# Altium PCB LM-003.PcbDoc
Units mil, origin at the board's own origin, x right, y up, seen from the top; angles counter-clockwise.
Board outline 7000 x 7000 mil, 6 copper layers (Top Layer, +5V, Mid-Layer 1, +3.3V, Mid-Layer 2, Bottom Layer), stack 48.435 mil thick; 55 components, 97 nets, 357 pads, 0 vias.
Unrouted connection lines stored in the file: 193.
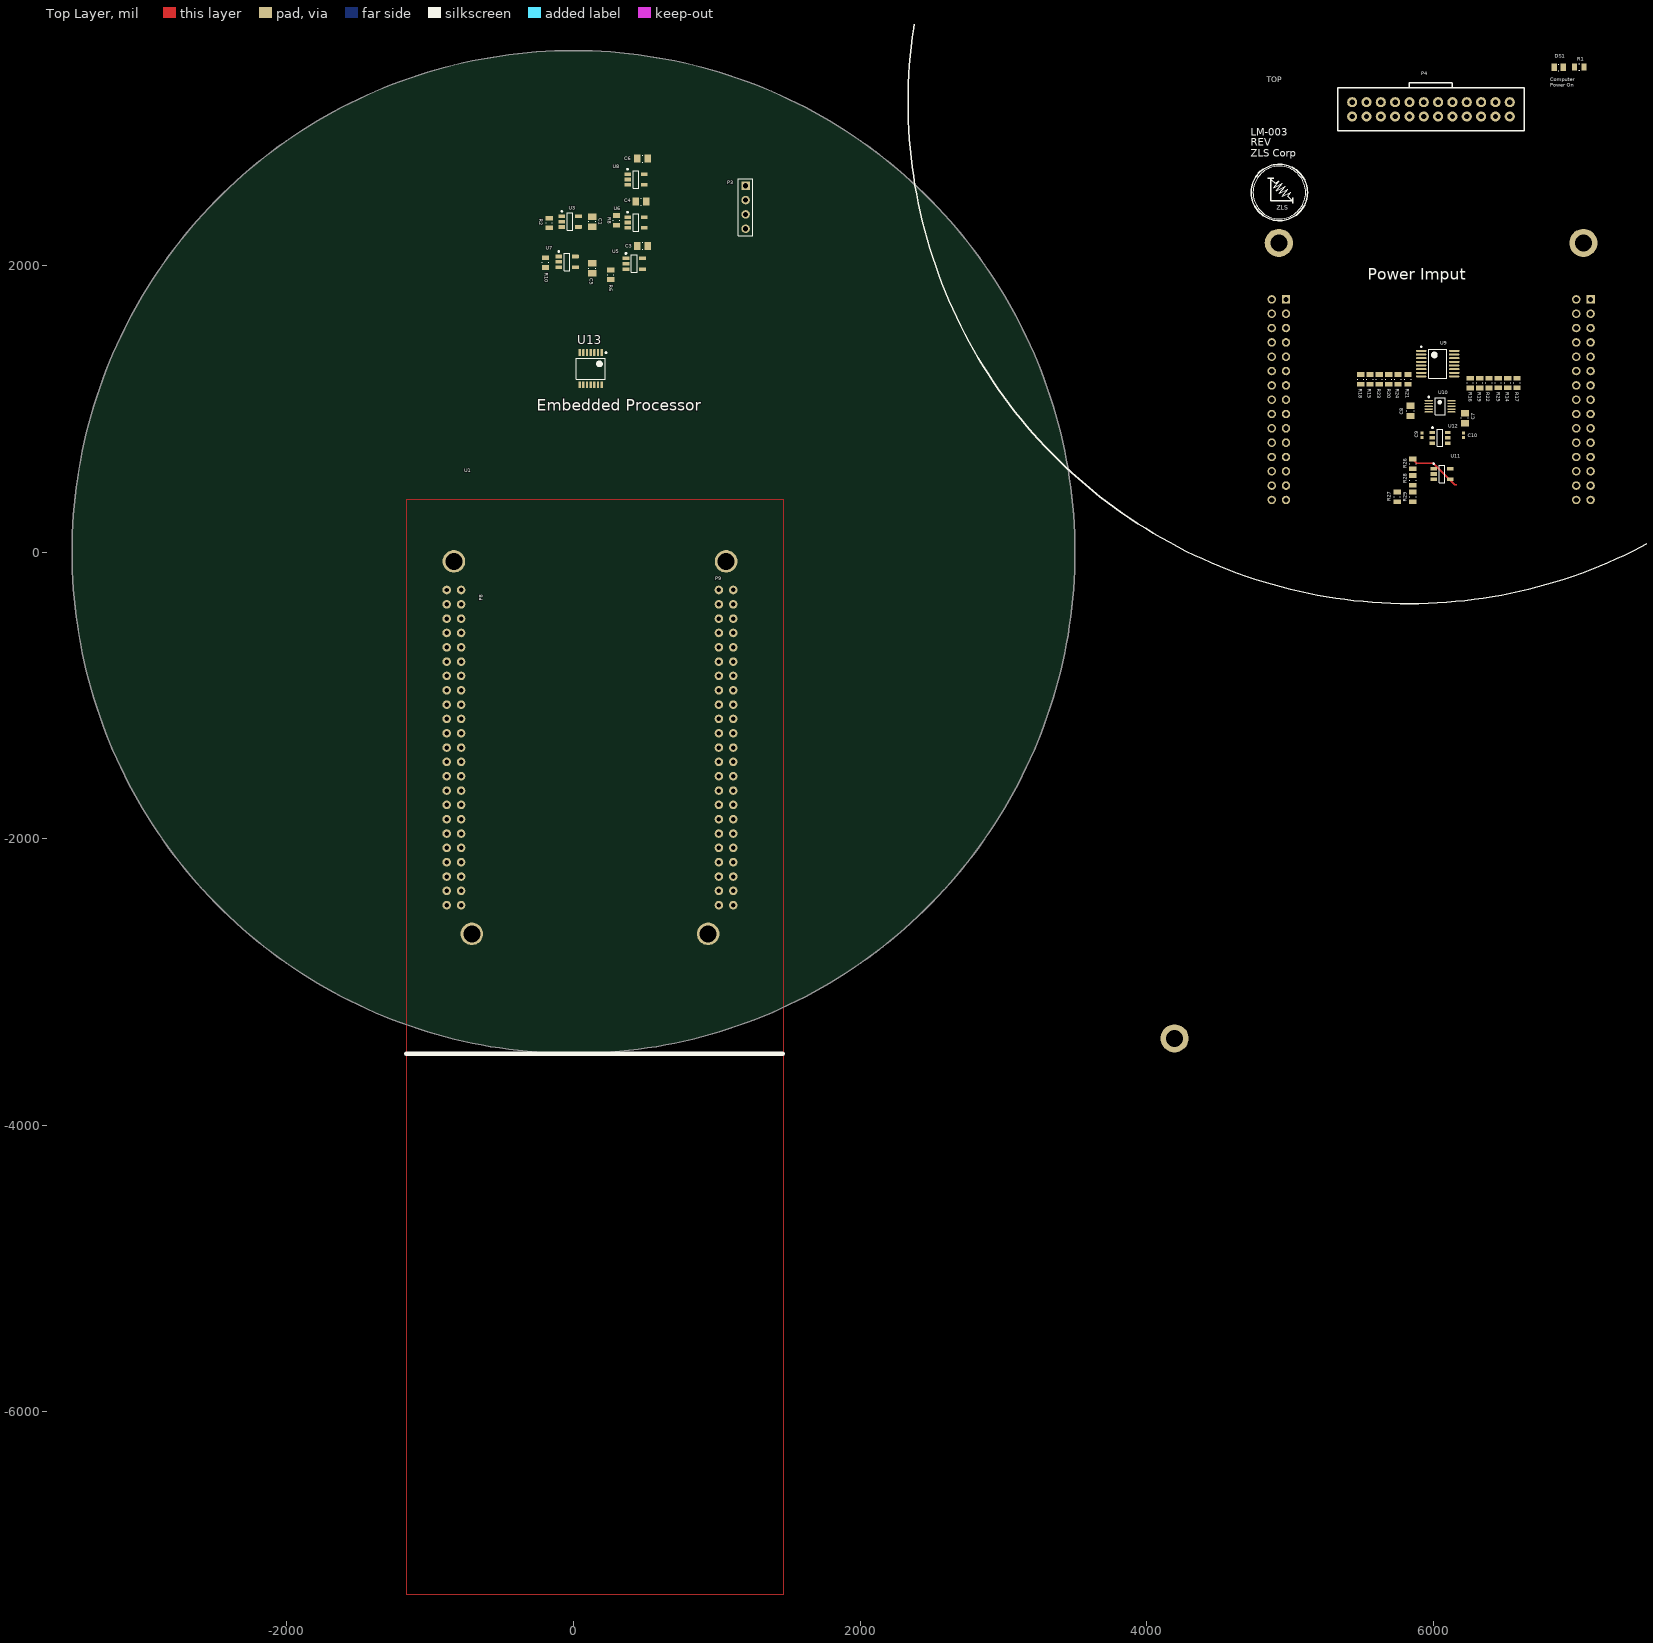
[diagram p0: Top Layer view]
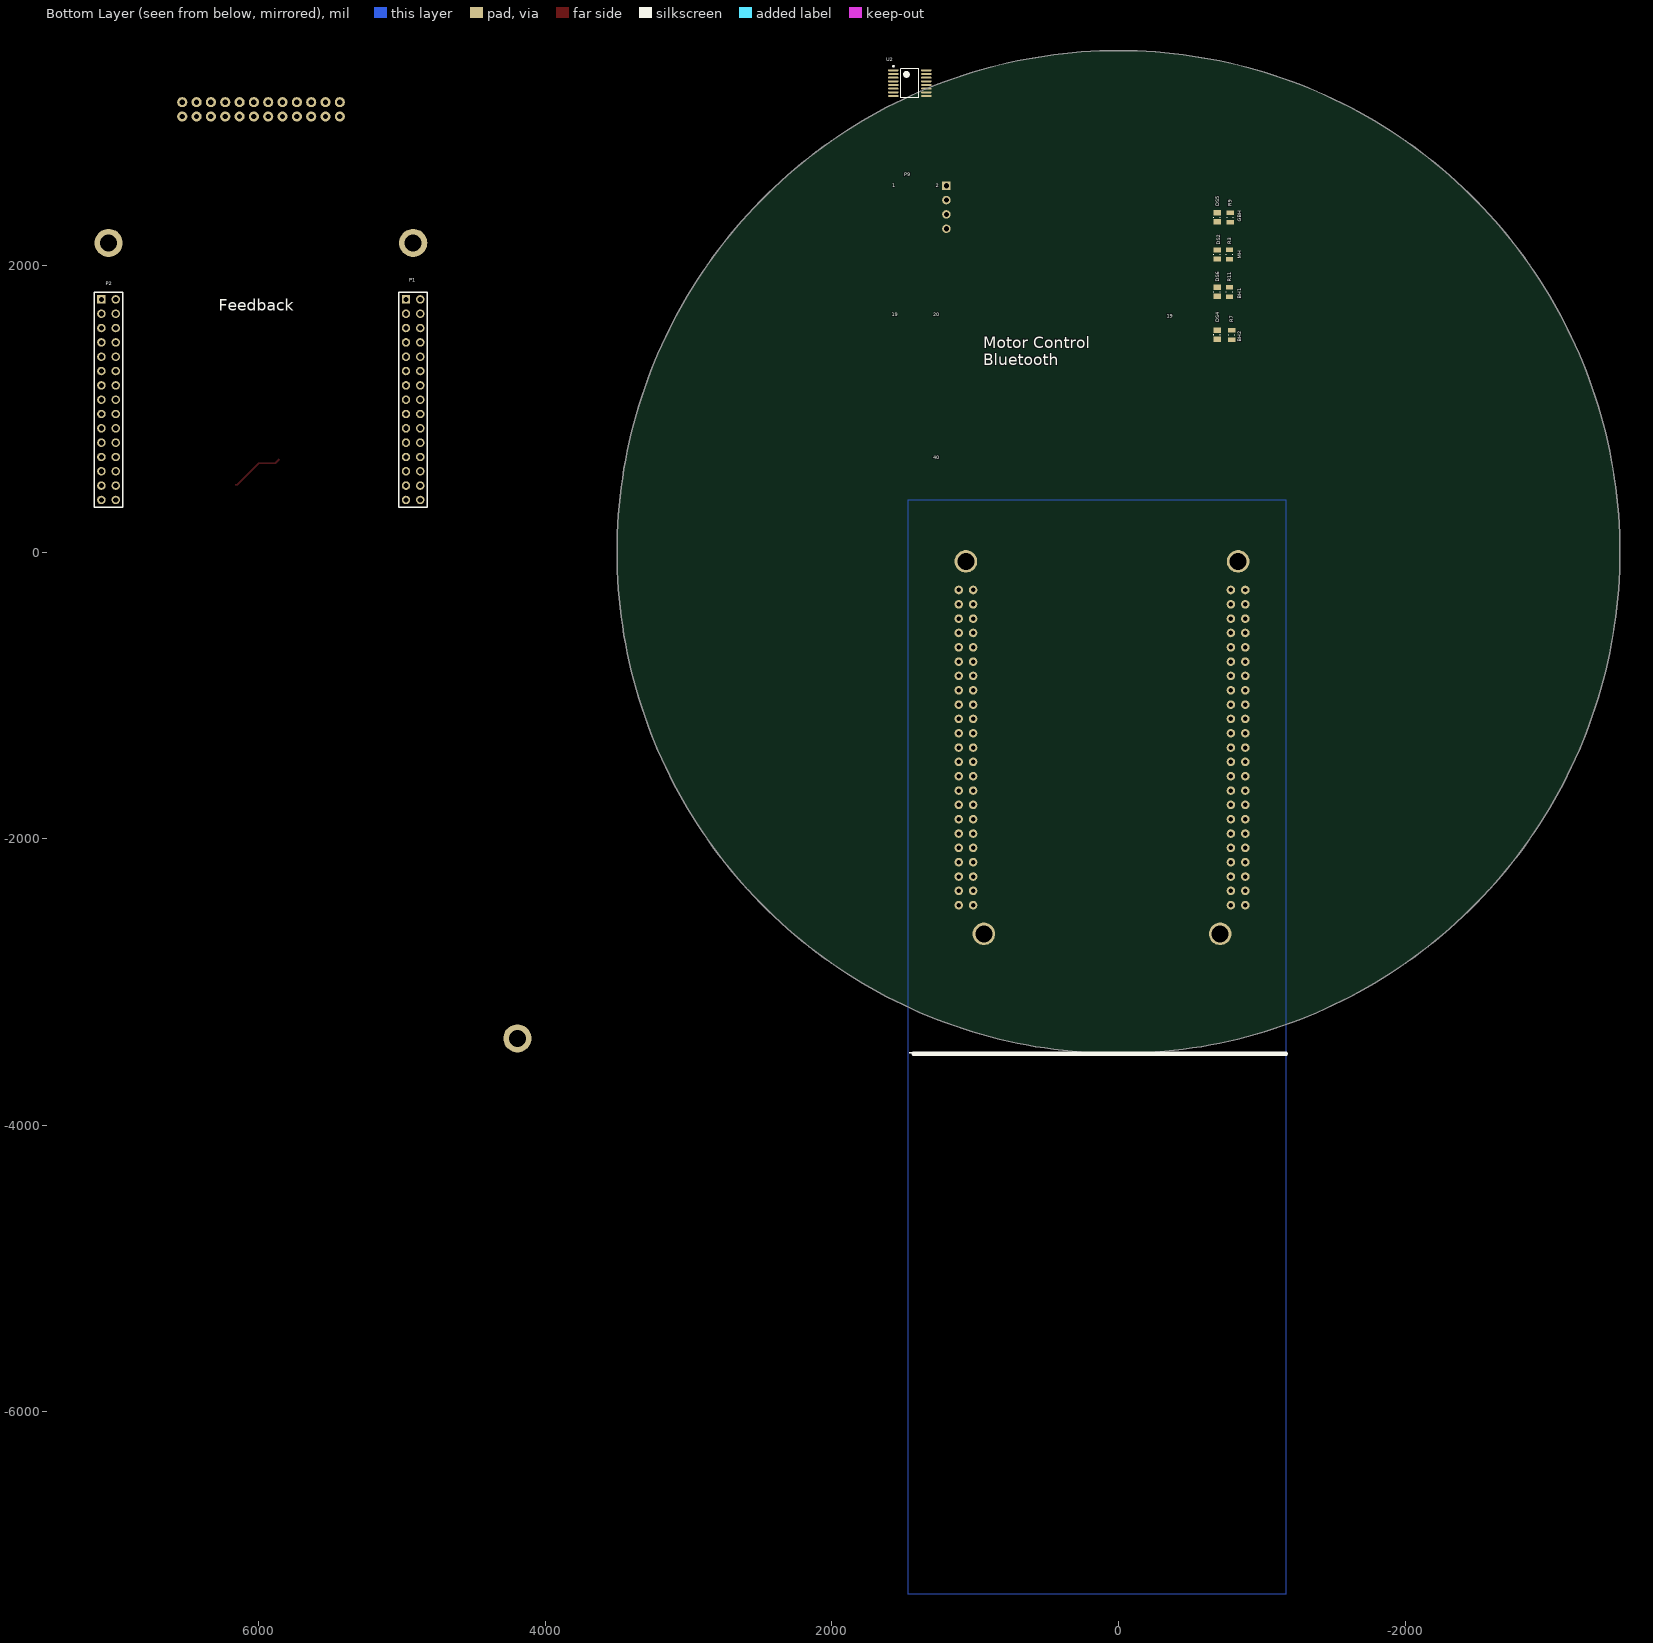
[diagram p1: Bottom Layer view, seen from below]
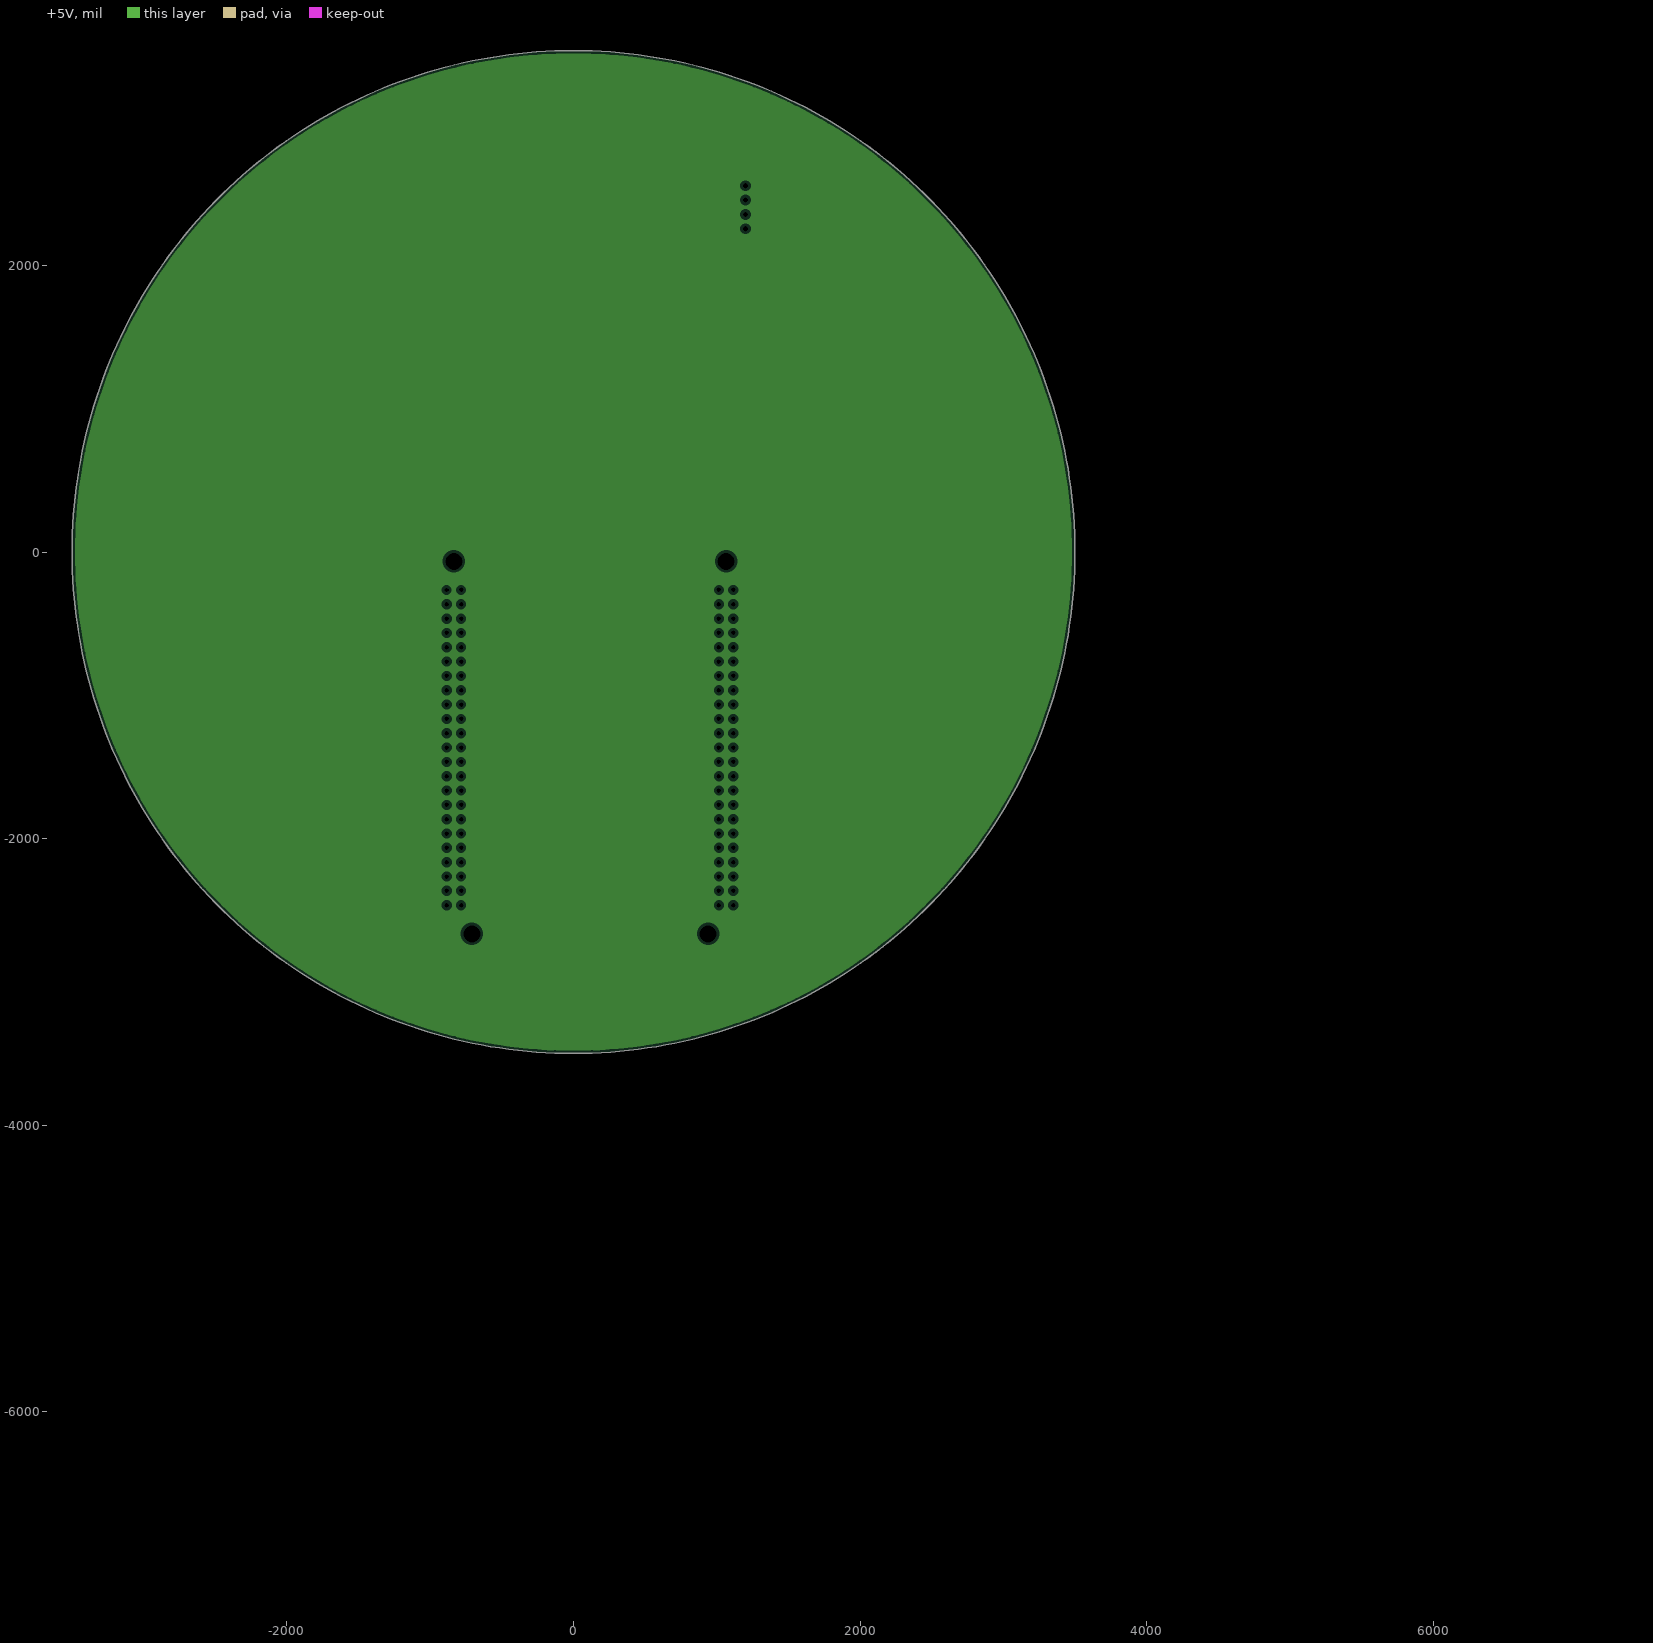
[diagram p2: +5V, clearances drawn from the general rule]
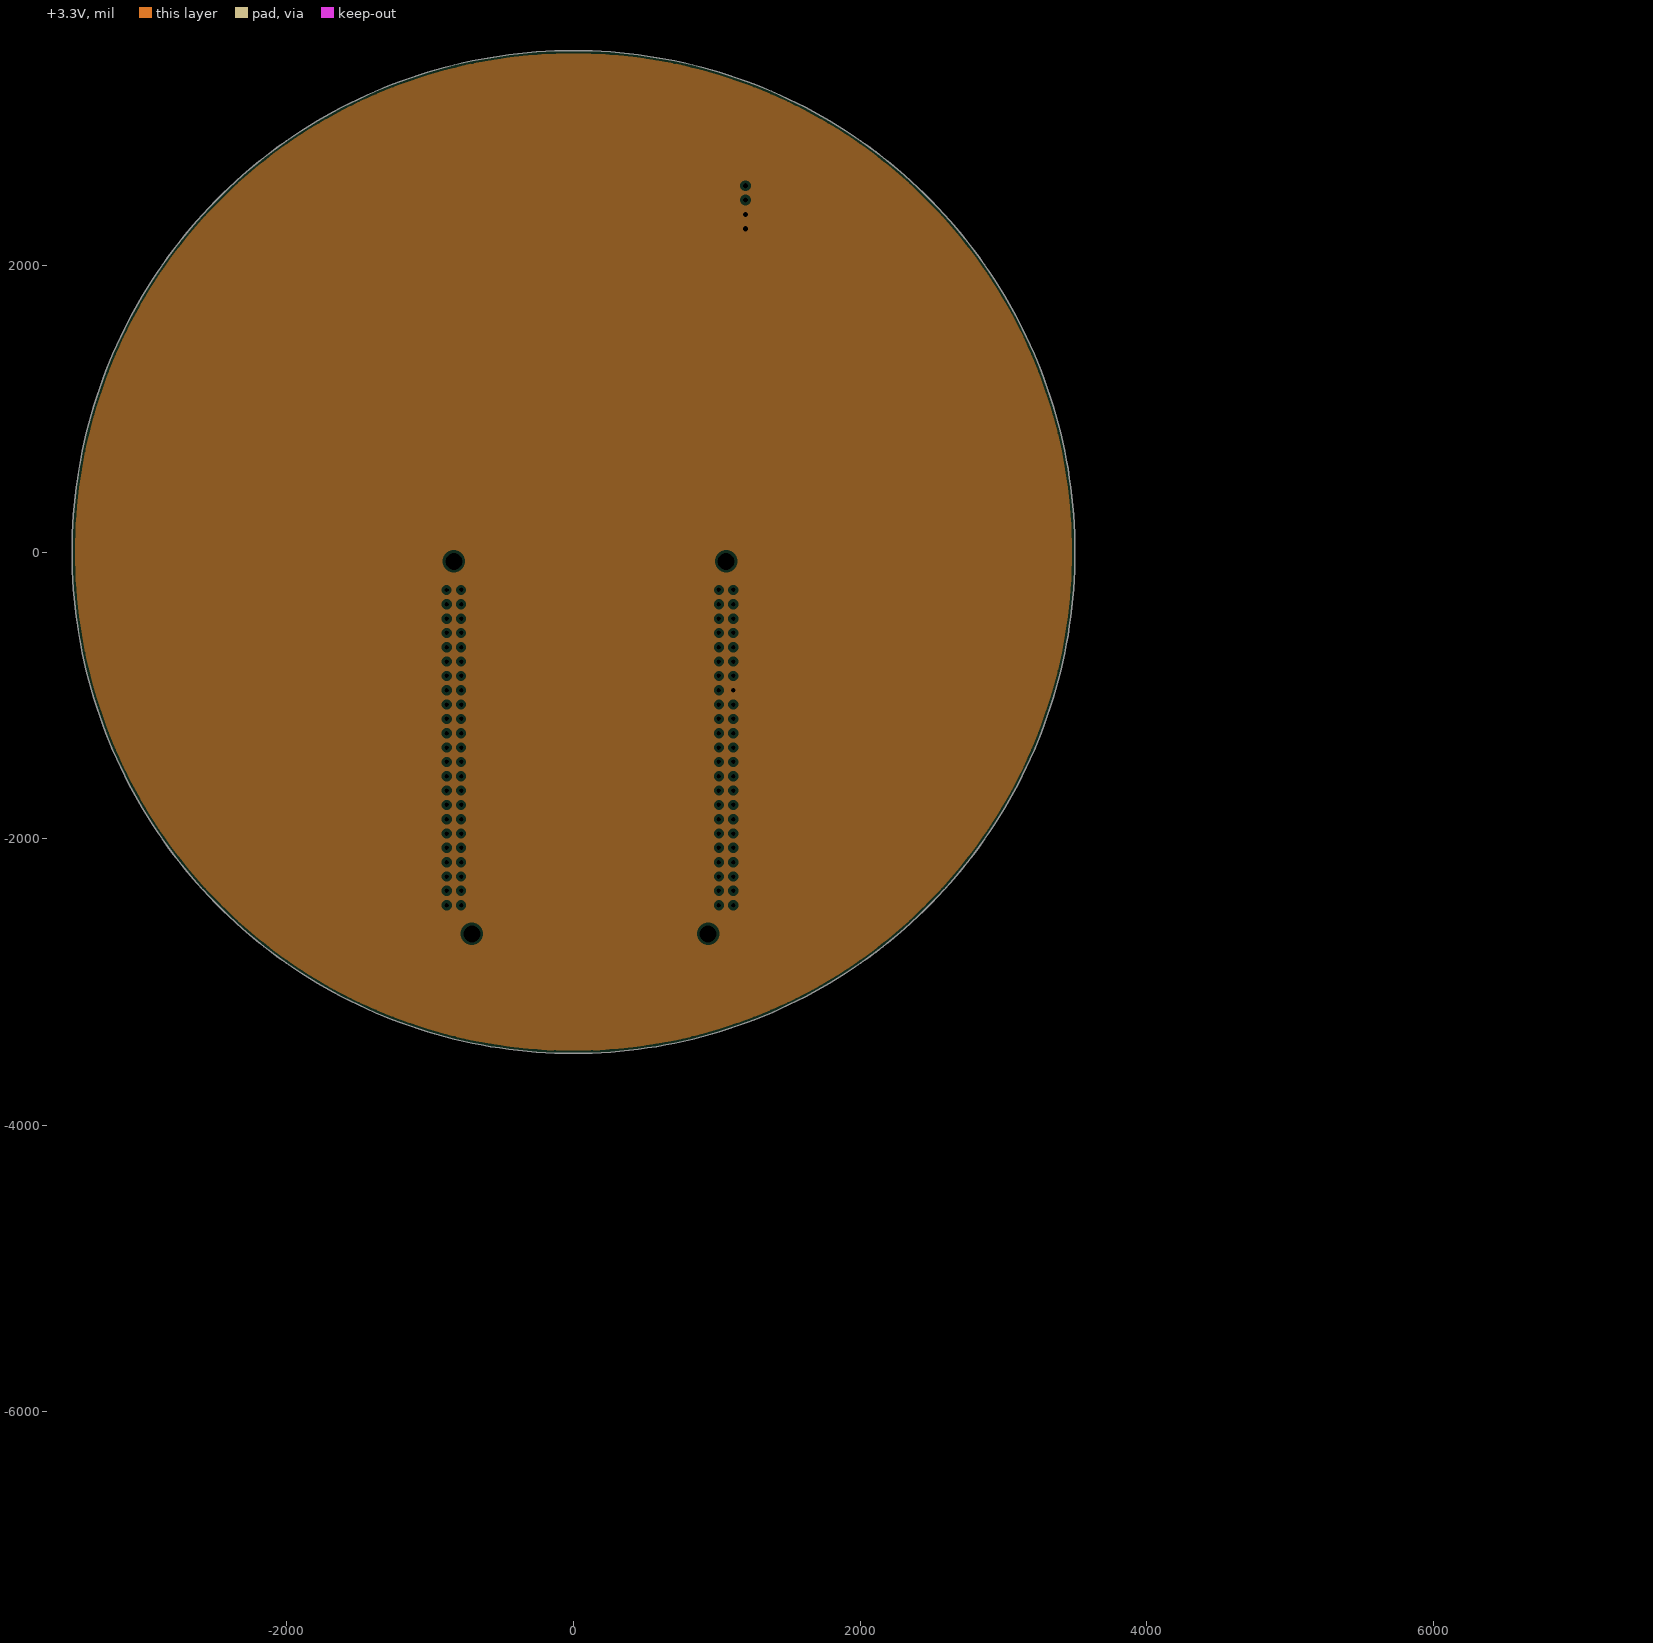
[diagram p3: +3.3V, clearances drawn from the general rule]

## Layer stack, top to bottom
Top Solder: solder mask 0.4, Solder Resist, Dk 3.5
Top Layer: signal copper 1.4
Dielectric 1: core 10, FR-4, Dk 4.2
+5V: plane copper 1.4173, net +5
Dielectric 7: prepreg 5, Dk 4.2
Mid-Layer 1: signal copper 1.4
Dielectric 6: core 10, Dk 4.2
+3.3V: plane copper 1.4173, net +3.3
Dielectric2: prepreg 5, FR-4, Dk 4.2
Mid-Layer 2: signal copper 1.4
Dielectric 5: core 10, Dk 4.2
Bottom Layer: signal copper 1.4
Bottom Solder: solder mask 0.4, Solder Resist, Dk 3.5

## Board outline
-3500,0 ccw(c0,0) 0,-3500 ccw(c0,0) 3500,0 ccw(c0,0) 0,3500 ccw(c0,0)

## Design rules (kind name [scope] priority, off if disabled: settings)
Clearance [All] p1: gap=5 ignorepadtopadclearanceinfootprint=FALSE except(0: Arc-Hole Track-Hole SMDPad-Hole THPad-Hole Via-Hole Fill-Hole Poly-Hole Region-Hole Text-Hole)
ComponentClearance [All] p1: gap=9 collisioncheckmode=3 verticalgap=10 showdistances=FALSE
HoleSize [All] p1: absolutevalues=TRUE maxlimit=196.85 minlimit=5 maxpercent=80.000 minpercent=20.000
MinimumAnnularRing [All] p1: minimumring=10
MinimumSolderMaskSliver [All] p1: minsoldermaskwidth=2
PlaneClearance [All] p1: clearance=20
PlaneConnect [All] p1: planeconnectstyle=Relief reliefexpansion=20 reliefentries=4 reliefconductorwidth=10 reliefairgap=10
PolygonConnect [All] p1: connectstyle=Relief reliefconductorwidth=10 reliefentries=4 polygonreliefangle="90 Angle" airgapwidth=10
RoutingVias [All] p1: holewidth=11.81 width=27.56 viastyle="Through Hole" minholewidth=3.94 minwidth=15 maxholewidth=28 maxwidth=50
SilkToSilkClearance [All] p1: silktosilkclearance=3.94
SilkToSolderMaskClearance [IsPad] p1: minsilkscreentomaskgap=2.5 clearancetoexposedcopper=TRUE
SolderMaskExpansion [All] p1: expansion=2
Width [All] p1: maxlimit=39.37 minlimit=5 preferedwidth=10
23 further rules are at their usual default settings.

## Classes and differential pairs
component class "BBB Headers": U1 U2 U13
component class Connectors: DS1 P1 P2 P3 P14 P16 P? R1
component class ADC: C7 C8 C9 C10 R14 R15 R16 R17 R18 R19 R20 R21 R22 R23 R24 R25 R26 R27 R28 R29 U9 U10 U11 U12
component class heater_control: C1 C3 C4 C5 C6 DS2 DS4 DS5 DS6 P4 R2 R3 R6 R7 R8 R9 R10 R11 U3 U5 U6 U7 U8

## Components (designator, comment, footprint, x,y, rotation, side; value= is the part's Value field where it differs from the comment)
C1 "CAP CER 0.1UF 25V X7R 0805" CAPC0805(2012)145_N 131.38,2306.38 r90 top
C3 "CAP CER 0.1UF 25V X7R 0805" CAPC0805(2012)145_N 481.38,2136.38 r0 top
C4 "CAP CER 0.1UF 25V X7R 0805" CAPC0805(2012)145_N 471.38,2446.38 r0 top
C5 "CAP CER 0.1UF 25V X7R 0805" CAPC0805(2012)145_N 131.38,1980 r90 top
C6 "CAP CER 0.1UF 25V X7R 0805" CAPC0805(2012)145_N 481.38,2746.38 r0 top
C7 "CAP CER 0.1UF 25V X7R 0805" CAPC0805(2012)145_N 6222.32,934.88 r270 top
C8 "CAP CER 0.1UF 25V X7R 0805" CAPC0805(2012)145_N 5842.32,984.88 r270 top
C9 "0.1uF" CAPC0402(1005)60_L 5922.32,814.88 r270 top
C10 "0.1uF" CAPC0402(1005)60_L 6212.32,814.88 r270 top
DS1 "Lite-On LTST-S220KGKT Green LED, 571 nm 2012 (0805) Side View, Rectangle Lens SMD package" 0805C_L 6876.1,3383.39 r0 top
DS2 "Visible Name Value Type    False Description Lite-On LTST-S220KRKT Red LED, 631 nm 2012 (0805) Side View, Rectangle Lens SMD package STRING" 0805C_L -688.62,2076.38 r270 bottom
DS4 "Visible Name Value Type    False Description Lite-On LTST-S220KRKT Red LED, 631 nm 2012 (0805) Side View, Rectangle Lens SMD package STRING" 0805C_L -688.62,1516.38 r270 bottom
DS5 "Visible Name Value Type    False Description Lite-On LTST-S220KRKT Red LED, 631 nm 2012 (0805) Side View, Rectangle Lens SMD package STRING" 0805C_L -688.62,2336.38 r270 bottom
DS6 "Visible Name Value Type    False Description Lite-On LTST-S220KRKT Red LED, 631 nm 2012 (0805) Side View, Rectangle Lens SMD package STRING" 0805C_L -688.62,1816.38 r270 bottom
P1 "SSW-115-23-G-D" SSW-115-23-G-D 4973.19,1763.38 r270 bottom locked
P2 "SSW-115-23-G-D" SSW-115-23-G-D 7099.17,1763.38 r270 bottom locked
P3 "TSW-104-14-G-S" HDR1X4 1201.38,2556.38 r270 top locked
P4 "IPL1-112-01-F-S-K" IPL1-112-01-F-S-K 5985,3090 r0 top
R1 "5.1K" RESC0805(2012)_L 7020,3385.28 r0 top
R2 "20k" RESC0805(2012)_L -168.62,2296.38 r90 top
R3 "4.99K" RESC0805(2012)_L -775,2076.62 r90 bottom
R6 "20K" RESC0805(2012)_L 260,1935 r270 top
R7 "4.99K" RESC0805(2012)_L -790,1515 r90 bottom
R8 "20K" RESC0805(2012)_L 300,2315 r90 top
R9 "4.99K" RESC0805(2012)_L -780,2335 r90 bottom
R10 "20K" RESC0805(2012)_L -195,2020 r90 top
R11 "4.99K" RESC0805(2012)_L -775,1815 r90 bottom
R14 "10k" RESC0805(2012)_L 6520,1180 r90 top
R15 "47.5K" RESC0805(2012)_L 5559.95,1205 r90 top
R16 "100K" RESC0805(2012)_L 6260,1179.13 r90 top
R17 "10k" RESC0805(2012)_L 6585,1180 r270 top
R18 "10k" RESC0805(2012)_L 5495,1205 r270 top
R19 "10k" RESC0805(2012)_L 6325,1179.13 r270 top
R20 "47.5K" RESC0805(2012)_L 5690,1205 r90 top
R21 "47.5K" RESC0805(2012)_L 5825,1205 r90 top
R22 "10k" RESC0805(2012)_L 6390,1179.13 r90 top
R23 "10k" RESC0805(2012)_L 5625,1205 r270 top
R24 "10k" RESC0805(2012)_L 5755,1205 r270 top
R25 "10k" RESC0805(2012)_L 6455,1180 r270 top
R26 "100K" RESC0805(2012)_L 5858.92,615 r90 top
R27 "100k" RESC0805(2012)_L 5750,385 r90 top
R28 "100k" RESC0805(2012)_L 5858.92,500 r90 top
R29 "15k" RESC0805(2012)_L 5858.92,385 r270 top
U1 "BBB Header x 2" "BEAGLEBONE BLACK THRU" 115,-1365 r0 top
U2 "ADG1608BRUZ" ADI-RU-16_M 1456.32,3272.88 r180 bottom
U3 "OPA188AIDBVR" DBV0005A_M -23.62,2306.38 r0 top
U5 "OPA188AIDBVR" DBV0005A_M 423.98,2012.28 r0 top
U6 "OPA188AIDBVR" DBV0005A_M 435.95,2300 r0 top
U7 "OPA188AIDBVR" DBV0005A_M -45,2025 r0 top
U8 "OPA188AIDBVR" DBV0005A_M 435.95,2600 r0 top
U9 "ADG1608BRUZ" ADI-RU-16_M 6032.32,1314.88 r0 top
U10 "MAX11100EUB+T" U10+2_L 6049.2,1017.06 r0 top
U11 "OPA188AIDBVR" DBV0005A_M 6062.32,544.88 r0 top
U12 "MAX6070AAUT41+T" SOT95P280X445-6N 6049.2,797.06 r0 top
U13 "OPA4188AIPW" PW0014A_L 120,1280 r270 top

## Footprints (in the part's own frame and the unit in brackets; to place one, negate y for a bottom-side part, rotate by r counter-clockwise, add the part's x,y. Pads: shape width x height; smd on the part's side, far side on the other; paste and mask are expansions set on the pad)
0805C_L [mm]
  rect 0.95x1.35 smd: 1(-0.8,0) 2(0.8,0)
  silkscreen extent -0.05,-0.58 0.05,0.58, body extent -1.1,-0.72 1.1,0.72, height 0.75
ADI-RU-16_M [mm] "SOP, 16-Leads, Body 5x4.4mm, Pitch 0.65mm, IPC Low Density"
  oval 1.85x0.35 smd: 1(-2.925,2.275) 2(-2.925,1.625) 3(-2.925,0.975) 4(-2.925,0.325) 5(-2.925,-0.325) 6(-2.925,-0.975) 7(-2.925,-1.625) 8(-2.925,-2.275) 9(2.925,-2.275) 10(2.925,-1.625) 11(2.925,-0.975) 12(2.925,-0.325) 13(2.925,0.325) 14(2.925,0.975) 15(2.925,1.625) 16(2.925,2.275)
  silkscreen extent -3.05,-2.55 1.6,3.12, body extent -2.25,-2.55 2.25,2.55, height 1.2
"BEAGLEBONE BLACK THRU" [mil]
  round 60 hole 31.5: 8-1(-900,1100) 8-3(-900,1000) 8-4(-1000,1000) 8-5(-900,900) 8-6(-1000,900) 8-7(-900,800) 8-8(-1000,800) 8-9(-900,700) 8-10(-1000,700) 8-11(-900,600) 8-12(-1000,600) 8-13(-900,500) 8-14(-1000,500) 8-15(-900,400) 8-16(-1000,400) 8-17(-900,300) 8-18(-1000,300) 8-19(-900,200) 8-20(-1000,200) 8-21(-900,100) 8-22(-1000,100) 8-23(-900,0) 8-24(-1000,0) 8-25(-900,-100) 8-26(-1000,-100) 8-27(-900,-200) 8-28(-1000,-200) 8-29(-900,-300) 8-30(-1000,-300) 8-31(-900,-400) 8-32(-1000,-400) 8-33(-900,-500) 8-34(-1000,-500) 8-35(-900,-600) 8-36(-1000,-600) 8-37(-900,-700) 8-38(-1000,-700) 8-39(-900,-800) 8-40(-1000,-800) 8-41(-900,-900) 8-42(-1000,-900) 8-43(-900,-1000) 8-44(-1000,-1000) 8-45(-900,-1100) 8-46(-1000,-1100) 9-1(1000,1100) 9-2(900,1100) 9-3(1000,1000) 9-4(900,1000) 9-5(1000,900) 9-6(900,900) 9-7(1000,800) 9-8(900,800) 9-9(1000,700) 9-10(900,700) 9-11(1000,600) 9-12(900,600) 9-13(1000,500) 9-14(900,500) 9-15(1000,400) 9-16(900,400) 9-17(1000,300) 9-18(900,300) 9-19(1000,200) 9-20(900,200) 9-21(1000,100) 9-22(900,100) 9-23(1000,0) 9-24(900,0) 9-25(1000,-100) 9-26(900,-100) 9-27(1000,-200) 9-28(900,-200) 9-29(1000,-300) 9-30(900,-300) 9-31(1000,-400) 9-32(900,-400) 9-33(1000,-500) 9-34(900,-500) 9-35(1000,-600) 9-36(900,-600) 9-37(1000,-700) 9-38(900,-700) 9-39(1000,-800) 9-40(900,-800) 9-41(1000,-900) 9-42(900,-900) 9-43(1000,-1000) 9-44(900,-1000) 9-45(1000,-1100) 9-46(900,-1100)
  round 60 hole 30 paste+0: 8-2(-1000,1100)
  round 157.48 hole 118.11 paste+0: ""(-950,1300)
  round 157.48 hole 118.11: ""(-825,-1300) ""(825,-1300) ""(950,1300)
  body extent -1048,-1163 1048,1160, height 315
CAPC0402(1005)60_L [mm] "Chip Capacitor, Body 1.0x0.5mm, Height 0.6mm, IPC High Density"
  rect 0.52x0.52 smd: 1(-0.4,0) 2(0.4,0)
  body extent -0.55,-0.3 0.55,0.3, height 0.6
CAPC0805(2012)145_N [mm] "Chip Capacitor, Body 2.0x1.2mm, Height 1.45mm, IPC Medium Density"
  rect 1.15x1.45 smd: 1(-0.9,0) 2(0.9,0)
  silkscreen extent -0.05,-0.62 0.05,0.63, body extent -1.1,-0.72 1.1,0.73, height 1.45
DBV0005A_M [mm] "SOT23, 5-Leads, Body 3.05x1.75mm, Pitch 0.95mm, IPC Low Density"
  rrect15% 1.2x0.65 smd: 1(-1.475,0.95) 2(-1.475,0) 3(-1.475,-0.95) 4(1.475,-0.95) 5(1.475,0.95)
  silkscreen extent -1.6,-1.55 0.5,1.95, body extent -1.42,-1.46 1.42,1.46, height 1.08
HDR1X4 [mm] "Connector; Header; 4 Position"
  rect 1.5x1.5 hole 0.9: 1(0,0)
  round 1.5 hole 0.9: 2(2.54,0) 3(5.08,0) 4(7.62,0)
  silkscreen extent -1.27,-1.27 8.89,1.27
IPL1-112-01-F-S-K [mm]
  round 1.8 hole 0.95: 1(-13.97,-1.27) 2(-13.97,1.27) 3(-11.43,-1.27) 4(-11.43,1.27) 5(-8.89,-1.27) 6(-8.89,1.27) 7(-6.35,-1.27) 8(-6.35,1.27) 9(-3.81,-1.27) 10(-3.81,1.27) 11(-1.27,-1.27) 12(-1.27,1.27) 13(1.27,-1.27) 14(1.27,1.27) 15(3.81,-1.27) 16(3.81,1.27) 17(6.35,-1.27) 18(6.35,1.27) 19(8.89,-1.27) 20(8.89,1.27) 21(11.43,-1.27) 22(11.43,1.27) 23(13.97,-1.27) 24(13.97,1.27)
  silkscreen extent -16.51,-3.81 16.51,3.81, body extent -15.95,-4.32 16.05,3.56, height 8.13
PW0014A_L [mm] "SOP, 14-Leads, Body 5.1x4.5mm, Pitch 0.65mm, IPC High Density"
  rrect25% 1.2x0.4 smd: 1(-2.85,1.95) 2(-2.85,1.3) 3(-2.85,0.65) 4(-2.85,0) 5(-2.85,-0.65) 6(-2.85,-1.3) 7(-2.85,-1.95) 8(2.85,-1.95) 9(2.85,-1.3) 10(2.85,-0.65) 11(2.85,0) 12(2.85,0.65) 13(2.85,1.3) 14(2.85,1.95)
  silkscreen extent -2.97,-2.55 1.85,2.83, body extent -3.21,-2.5 3.21,2.5, height 1
RESC0805(2012)_L [mm] "Chip Resistor, Body 2.0x1.3mm, IPC High Density"
  rect 0.85x1.3 smd: 1(-0.85,0) 2(0.85,0)
  silkscreen extent -0.05,-0.55 0.05,0.55, body extent -1.1,-0.67 1.1,0.68, height 0.7
SOT95P280X445-6N [mm] "SOT23, 6-Leads, Body 2.90x2.80mm, Pitch 0.95mm, IPC Medium Density"
  rect 1x0.6 smd: 1(-1.375,0.95) 2(-1.375,0) 3(-1.375,-0.95) 4(1.375,-0.95) 5(1.375,0) 6(1.375,0.95)
  silkscreen extent -1.5,-1.5 0.5,1.92, body extent -2.11,-1.78 2.11,1.73, height 1.08
SSW-115-23-G-D [mm]
  rect 1.5x1.5 hole 0.92: 1(0,0)
  round 1.5 hole 0.92: 2(0,2.54) 3(2.54,0) 4(2.54,2.54) 5(5.08,0) 6(5.08,2.54) 7(7.62,0) 8(7.62,2.54) 9(10.16,0) 10(10.16,2.54) 11(12.7,0) 12(12.7,2.54) 13(15.24,0) 14(15.24,2.54) 15(17.78,0) 16(17.78,2.54) 17(20.32,0) 18(20.32,2.54) 19(22.86,0) 20(22.86,2.54) 21(25.4,0) 22(25.4,2.54) 23(27.94,0) 24(27.94,2.54) 25(30.48,0) 26(30.48,2.54) 27(33.02,0) 28(33.02,2.54) 29(35.56,0) 30(35.56,2.54)
  silkscreen extent -1.27,-1.27 36.83,3.81, body extent -1.52,-1.27 37.08,3.68, height 8.51
U10+2_L [mm] "TSSOP, 10-Leads, Body 3x3mm, Pitch 0.5mm, IPC High Density"
  oval 1.45x0.25 smd: 1(-2.025,1) 2(-2.025,0.5) 3(-2.025,0) 4(-2.025,-0.5) 5(-2.025,-1) 6(2.025,-1) 7(2.025,-0.5) 8(2.025,0) 9(2.025,0.5) 10(2.025,1)
  silkscreen extent -2.15,-1.53 0.9,1.8, body extent -1.55,-1.55 1.55,1.55, height 1.1

## Part data
C1 C3 C4 C5 C6 C7 C8: library part CMP-1036-04795-1, Capacitance=0.1µF, Manufacturer="Murata Electronics North America", Manufacturer Part Number=GRM21BR71E104KA01L, Operating Temperature="-55°C ~ 125°C", Package / Case="0805 (2012 Metric)", Ratings=-, Supplier Part Number 1=490-1673-6-ND, Temperature Coefficient=X7R, Tolerance=±10%, Voltage - Rated=25V, Applications="General Purpose", Category=Capacitors, ComponentLink1Description=http://www.murata.com/~/media/webrenewal/support/library/catalog/products/capacitor/mlcc/c02e.ashx, ComponentLink1URL=http://www.murata.com/~/media/webrenewal/support/library/catalog/products/capacitor/mlcc/c02e.ashx, Features=-, Height - Seated (Max)=-, Lead Spacing=-, Lead Style=-, Mounting Type="Surface Mount, MLCC", Packaging=Digi-Reel®, Part Status=Active, Pricing 1="1=0.2, 10=0.145, 100=0.0683, 500=0.04788, 1000=0.03964 (USD)", RoHS="RoHS Compliant", Size / Dimension="0.079\" L x 0.049\" W (2.00mm x 1.25mm)", Stock 1=891652, Supplier 1=Digi-Key, Thickness (Max)="0.053\" (1.35mm)"
C9 C10: library part CMP-1034-00252-1, "CAP CER 0.1UF 10V X7R 0402", Manufacturer="Murata Electronics North America", Manufacturer Part Number=GRM155R71A104KA01D, Operating Temperature="-55°C ~ 125°C", Package / Case="0402 (1005 Metric)", Ratings=-, Supplier Part Number 1=490-6321-1-ND, Temperature Coefficient=X7R, Tolerance=±10%, Voltage - Rated=10V, Applications="General Purpose", Category=Capacitors, ComponentLink1Description=http://www.murata.com/~/media/webrenewal/support/library/catalog/products/capacitor/mlcc/c02e.ashx?la=en-us, ComponentLink1URL=http://www.murata.com/~/media/webrenewal/support/library/catalog/products/capacitor/mlcc/c02e.ashx?la=en-us, Features=-, Height - Seated (Max)=-, Lead Spacing=-, Mounting Type="Surface Mount, MLCC", Packaging="Cut Tape (CT)", Part Status=Active, Pricing 1="1=0.1, 10=0.014, 100=0.0063, 500=0.00446, 1000=0.00351, 2500=0.00319, 5000=0.00293 (USD)", RoHS="RoHS Compliant", Size / Dimension="0.039\" L x 0.020\" W (1.00mm x 0.50mm)", Stock 1=2920395, Supplier 1=Digi-Key, Thickness (Max)="0.022\" (0.55mm)"
DS1: library part "LED A/K", Case/Package=0805, Case Code (Metric)=2012, Colour=Green, Forward Current=20mA, Forward Voltage=2V, Lens Colour=Colorless, Manufacturer="Vishay / Lite-On", Manufacturer Part Number=LTST-S220KGKT, Max Operating Temperature=85°C, Min Operating Temperature=-55°C, Package Quantity=4000, Power Dissipation=75W, Power Rating=75mW, Supplier Part Number 1=160-1468-1-ND, Case Code (Imperial)=0805, ComponentLink1Description=https://datasheet.ciiva.com/11775/0900766b80dc0b70-11775441.pdf, ComponentLink1URL=https://datasheet.ciiva.com/11775/0900766b80dc0b70-11775441.pdf, ComponentLink2Description=https://datasheet.ciiva.com/2110/s-110-ltst-s220kgkt-2110069.pdf, ComponentLink2URL=https://datasheet.ciiva.com/2110/s-110-ltst-s220kgkt-2110069.pdf, ComponentLink3Description=https://datasheet.ciiva.com/2110/s-110-ltst-s220kgkt-2110070.pdf, ComponentLink3URL=https://datasheet.ciiva.com/2110/s-110-ltst-s220kgkt-2110070.pdf, ComponentLink4Description=https://datasheet.ciiva.com/12400/100-ltst-s220kgkt-59602-12400886.pdf, ComponentLink4URL=https://datasheet.ciiva.com/12400/100-ltst-s220kgkt-59602-12400886.pdf, ComponentLink5Description=https://datasheet.ciiva.com/2110/s-110-ltst-s220kgkt-2110071.pdf, ComponentLink5URL=https://datasheet.ciiva.com/2110/s-110-ltst-s220kgkt-2110071.pdf, ComponentLink6Description=https://datasheet.ciiva.com/16379/ltst-s220kgkt-16379082.pdf, ComponentLink6URL=https://datasheet.ciiva.com/16379/ltst-s220kgkt-16379082.pdf, Depth=0.6mm, Dominant Wavelength=568nm, Height=0.6mm, Illumination Colour=Green, Lead Free="Lead Free", Length=2.1mm, Lens Style=Diffused,Colorless, Lens Transparency=Clear, Luminous Intensity=35mcd, Mount="Surface Mount", Number of Elements=1, Number of LEDs=1, Number of Pins=2, Packaging="Tape and Reel", Pricing 1="1=0.29, 10=0.212, 25=0.1564, 100=0.1117, 250=0.0759, 500=0.067, 1000=0.0525 (USD)", Radiation Hardening=No, Stock 1=74800, Supplier 1=Digi-Key, Test Current=20mA, Viewing Angle=130°, Wavelength=574nm, Width=1mm
DS2 DS4 DS5 DS6: library part "LED A/K", Case/Package=0805, Case Code (Metric)=2012, Colour=Red, Forward Current=20mA, Forward Voltage=2V, Lens Colour=Colorless, Manufacturer="Vishay / Lite-On", Manufacturer Part Number=LTST-S220KRKT, Max Operating Temperature=85°C, Min Operating Temperature=-55°C, Package Quantity=4000, Power Dissipation=75mW, Supplier Part Number 1=160-1469-1-ND, Case Code (Imperial)=0805, ComponentLink1Description=https://datasheet.ciiva.com/2110/s-110-ltst-s220krkt-2110132.pdf, ComponentLink1URL=https://datasheet.ciiva.com/2110/s-110-ltst-s220krkt-2110132.pdf, ComponentLink2Description=https://datasheet.ciiva.com/2110/s-110-ltst-s220krkt-2110133.pdf, ComponentLink2URL=https://datasheet.ciiva.com/2110/s-110-ltst-s220krkt-2110133.pdf, ComponentLink3Description=https://datasheet.ciiva.com/2110/s-110-ltst-s220krkt-2110134.pdf, ComponentLink3URL=https://datasheet.ciiva.com/2110/s-110-ltst-s220krkt-2110134.pdf, ComponentLink4Description=https://datasheet.ciiva.com/12403/lite-on-ltst-s220krkt-187389-12403798.pdf, ComponentLink4URL=https://datasheet.ciiva.com/12403/lite-on-ltst-s220krkt-187389-12403798.pdf, ComponentLink5Description=https://datasheet.ciiva.com/16345/lite-onltst-s220krkt-16345511.pdf, ComponentLink5URL=https://datasheet.ciiva.com/16345/lite-onltst-s220krkt-16345511.pdf, ComponentLink6Description=https://datasheet.ciiva.com/15118/getdatasheetpartid-225752-15118120.pdf, ComponentLink6URL=https://datasheet.ciiva.com/15118/getdatasheetpartid-225752-15118120.pdf, ComponentLink7Description=https://datasheet.ciiva.com/14633/0900766b80dc0b76-14633737.pdf, ComponentLink7URL=https://datasheet.ciiva.com/14633/0900766b80dc0b76-14633737.pdf, ComponentLink8Description=https://datasheet.ciiva.com/11775/0900766b80dc0b76-11775439.pdf, ComponentLink8URL=https://datasheet.ciiva.com/11775/0900766b80dc0b76-11775439.pdf, Depth=0.6mm, Dominant Wavelength=631nm, Height=0.6mm, Illumination Colour=Red, Lead Free="Lead Free", Length=2.1mm, Lens Style=Diffused,Colorless, Lens Transparency=Clear, Luminous Intensity=54mcd, Mount="Surface Mount", Number of Elements=1, Number of LEDs=1, Number of Pins=2, Packaging="Tape and Reel", Power Rating=75mW, Pricing 1="1=0.31, 10=0.225, 25=0.1656, 100=0.1183, 250=0.0804, 500=0.071, 1000=0.0556 (USD)", Radiation Hardening=No, Stock 1=108191, Supplier 1=Digi-Key, Test Current=20mA, Viewing Angle=130°, Wavelength=639nm, Width=1mm
P1 P2: library part "Header 15X2", "Header, 15-Pin, Dual row", Current Rating="5.7A per Contact", Insulation Color=Black, Manufacturer="Samtec Inc.", Material Flammability Rating="UL94 V-0", Operating Temperature="-55°C ~ 125°C", Supplier Part Number 1=SSW-115-23-G-D-ND, Voltage Rating=-, Applications=-, Category="Connectors, Interconnects", Connector Type=Receptacle, Contact Finish - Mating=Gold, Contact Finish - Post=Gold, Contact Finish Thickness - Mating="20.0µin (0.51µm)", Contact Finish Thickness - Post="3.00µin (0.076µm)", Contact Length - Post="0.394\" (10.00mm)", Contact Material="Phosphor Bronze", Contact Shape=Square, Contact Type=Forked, Fastening Type=Push-Pull, Features=-, Ingress Protection=-, Insulation Height="0.335\" (8.51mm)", Insulation Material="Liquid Crystal Polymer (LCP)", Manufacturer Part Number=SSW-115-23-G-D, Mated Stacking Heights=-, Mounting Type="Through Hole", Number of Positions=30, Number of Positions Loaded=All, Packaging=Bulk, Part Status=Active, Pitch - Mating="0.100\" (2.54mm)", Pricing 1="1=5.3 (USD)", RoHS="RoHS Compliant", Row Spacing - Mating="0.100\" (2.54mm)", Stock 1=0, Style="Board to Board or Cable", Supplier 1=Digi-Key, Termination=Solder
P3: library part "Header 4", "Header, 4-Pin", Current Rating=-, Insulation Color=Black, Manufacturer="Samtec Inc.", Material Flammability Rating="UL94 V-0", Operating Temperature="-55°C ~ 125°C", Supplier Part Number 1=SAM1053-04-ND, Applications=-, Category="Connectors, Interconnects", ComponentLink1Description=http://suddendocs.samtec.com/prints/tsw-xxx-xx-xxx-x-xx-xxx-mkt.pdf, ComponentLink1URL=http://suddendocs.samtec.com/prints/tsw-xxx-xx-xxx-x-xx-xxx-mkt.pdf, Connector Type=Header, Contact Finish - Mating=Gold, Contact Finish - Post=Gold, Contact Finish Thickness - Mating="10.0µin (0.25µm)", Contact Finish Thickness - Post="3.00µin (0.076µm)", Contact Length - Mating="0.320\" (8.13mm)", Contact Length - Post="0.110\" (2.79mm)", Contact Material="Phosphor Bronze", Contact Shape=Square, Contact Type="Male Pin", Fastening Type=Push-Pull, Features=-, Ingress Protection=-, Insulation Height="0.100\" (2.54mm)", Insulation Material="Polybutylene Terephthalate (PBT)", Manufacturer Part Number=TSW-104-14-G-S, Mated Stacking Heights=-, Mounting Type="Through Hole", Number of Positions=4, Number of Positions Loaded=All, Number of Rows=1, Overall Contact Length="0.530\" (13.46mm)", Packaging=Bulk, Part Status=Active, Pitch - Mating="0.100\" (2.54mm)", Pricing 1="1=1.02, 10=0.915, 100=0.7537, 500=0.59578, 1000=0.51143, 5000=0.46657, 10000=0.44863 (USD)", RoHS="RoHS Compliant", Row Spacing - Mating=-, Shrouding=Unshrouded, Stock 1=278, Style="Board to Board or Cable", Supplier 1=Digi-Key, Termination=Solder, Voltage Rating=-
P4: "IPL1-112-01-F-D-K", Manufacturer="Samtec Inc.", Supplier Part Number 1=IPL1-112-01-F-S-K-ND, Category="Connectors, Interconnects", Manufacturer Part Number=IPL1-112-01-F-S-K, Part Status=Active, Pricing 1="1=2.63 (USD)", RoHS="RoHS Compliant", Stock 1=0, Supplier 1=Digi-Key
R1: library part CMP-1013-00215-1, "RES SMD 5.1K OHM 5% 1/8W 0805", Manufacturer="Vishay Dale", Manufacturer Part Number=CRCW08055K10JNEA, Operating Temperature="-55°C ~ 155°C", Package / Case="0805 (2012 Metric)", Power (Watts)="0.125W, 1/8W", Supplier Device Package=0805, Supplier Part Number 1=541-5.1KACT-ND, Temperature Coefficient=±200ppm/°C, Tolerance=±5%, Category=Resistors, ComponentLink1Description=http://www.vishay.com/docs/20035/dcrcwe3.pdf, ComponentLink1URL=http://www.vishay.com/docs/20035/dcrcwe3.pdf, Composition="Thick Film", Failure Rate=-, Features="Automotive AEC-Q200", Height - Seated (Max)="0.020\" (0.50mm)", Packaging="Cut Tape (CT)", Part Status=Active, Pricing 1="1=0.1, 10=0.044, 100=0.0178, 1000=0.00802, 2500=0.00696 (USD)", RoHS="RoHS Compliant", Size / Dimension="0.079\" L x 0.049\" W (2.00mm x 1.25mm)", Stock 1=429, Supplier 1=Digi-Key
R2 R6 R8 R10: library part CMP-1013-00215-1, "RES SMD 20K OHM 1% 1/8W 0805", Manufacturer="Panasonic Electronic Components", Manufacturer Part Number=ERJ-6ENF2002V, Operating Temperature="-55°C ~ 155°C", Package / Case="0805 (2012 Metric)", Power (Watts)="0.125W, 1/8W", Supplier Device Package=0805, Supplier Part Number 1=P20.0KCCT-ND, Temperature Coefficient=±100ppm/°C, Tolerance=±1%, Category=Resistors, ComponentLink1Description=https://industrial.panasonic.com/cdbs/www-data/pdf/RDA0000/AOA0000C304.pdf, ComponentLink1URL=https://industrial.panasonic.com/cdbs/www-data/pdf/RDA0000/AOA0000C304.pdf, Composition="Thick Film", Failure Rate=-, Features="Automotive AEC-Q200", Height - Seated (Max)="0.028\" (0.70mm)", Packaging="Cut Tape (CT)", Part Status=Active, Pricing 1="1=0.11, 10=0.1, 100=0.0385, 1000=0.01695, 2500=0.01464 (USD)", RoHS="RoHS Compliant", Size / Dimension="0.079\" L x 0.049\" W (2.00mm x 1.25mm)", Stock 1=269698, Supplier 1=Digi-Key
R3 R7 R9 R11: library part CMP-1013-00215-1, "RES SMD 4.99K OHM 1% 1/8W 0805", Manufacturer="Panasonic Electronic Components", Manufacturer Part Number=ERJ-6ENF4991V, Operating Temperature="-55°C ~ 155°C", Package / Case="0805 (2012 Metric)", Power (Watts)="0.125W, 1/8W", Supplier Device Package=0805, Supplier Part Number 1=P4.99KCCT-ND, Temperature Coefficient=±100ppm/°C, Tolerance=±1%, Category=Resistors, ComponentLink1Description=https://industrial.panasonic.com/cdbs/www-data/pdf/RDA0000/AOA0000C304.pdf, ComponentLink1URL=https://industrial.panasonic.com/cdbs/www-data/pdf/RDA0000/AOA0000C304.pdf, Composition="Thick Film", Failure Rate=-, Features="Automotive AEC-Q200", Height - Seated (Max)="0.028\" (0.70mm)", Packaging="Cut Tape (CT)", Part Status=Active, Pricing 1="1=0.11, 10=0.1, 100=0.0385, 1000=0.01695, 2500=0.01464 (USD)", RoHS="RoHS Compliant", Size / Dimension="0.079\" L x 0.049\" W (2.00mm x 1.25mm)", Stock 1=1015773, Supplier 1=Digi-Key
R14 R17 R18 R19 R22 R23 R24 R25: library part CMP-1013-00215-1, "RES SMD 10K OHM 1% 1/8W 0805", Manufacturer=Yageo, Manufacturer Part Number=AT0603FRE0710KL, Operating Temperature="-55°C ~ 155°C", Package / Case="0603 (1608 Metric)", Power (Watts)="0.1W, 1/10W", Supplier Device Package=0603, Supplier Part Number 1=YAG2122CT-ND, Temperature Coefficient=±50ppm/°C, Tolerance=±1%, Category=Resistors, ComponentLink1Description=http://www.yageo.com/documents/recent/PYu-AT_51_RoHS_L_5.pdf, ComponentLink1URL=http://www.yageo.com/documents/recent/PYu-AT_51_RoHS_L_5.pdf, Composition="Thin Film", Failure Rate=-, Features="Anti-Sulfur, Automotive AEC-Q200, Moisture Resistant", Height - Seated (Max)="0.022\" (0.55mm)", Packaging="Cut Tape (CT)", Part Status=Active, Pricing 1="1=0.2, 10=0.17, 100=0.0664, 1000=0.02778, 2500=0.02546 (USD)", RoHS="RoHS Compliant", Size / Dimension="0.063\" L x 0.032\" W (1.60mm x 0.80mm)", Stock 1=13100, Supplier 1=Digi-Key
R15 R20 R21: library part CMP-1013-00215-1, "RES SMD 47.5K OHM 1% 1/10W 0805", Manufacturer=Yageo, Manufacturer Part Number=RT0603FRE0747K5L, Operating Temperature="-55°C ~ 155°C", Package / Case="0603 (1608 Metric)", Power (Watts)="0.1W, 1/10W", Supplier Device Package=0603, Supplier Part Number 1=YAG5964CT-ND, Temperature Coefficient=±50ppm/°C, Tolerance=±1%, Category=Resistors, ComponentLink1Description=http://www.yageo.com/documents/recent/PYu-RT_1-to-0.01_RoHS_L_9.pdf, ComponentLink1URL=http://www.yageo.com/documents/recent/PYu-RT_1-to-0.01_RoHS_L_9.pdf, Composition="Thin Film", Failure Rate=-, Features=-, Height - Seated (Max)="0.022\" (0.55mm)", Packaging="Cut Tape (CT)", Part Status=Active, Pricing 1="1=0.1, 10=0.068, 100=0.0275, 1000=0.01236, 2500=0.01073 (USD)", RoHS="RoHS Compliant", Size / Dimension="0.063\" L x 0.032\" W (1.60mm x 0.80mm)", Stock 1=5000, Supplier 1=Digi-Key
R16 R26 R27 R28: library part CMP-1013-00215-1, "RES SMD 100K OHM 1% 1/10W 0805", Manufacturer="Vishay Beyschlag", Manufacturer Part Number=MCS04020C1003FE000, Operating Temperature="-55°C ~ 155°C", Package / Case="0402 (1005 Metric)", Power (Watts)="0.1W, 1/10W", Supplier Device Package=0402, Supplier Part Number 1=MCS0402-100K-CFCT-ND, Temperature Coefficient=±50ppm/°C, Tolerance=±1%, Category=Resistors, ComponentLink1Description=http://www.vishay.com/docs/28705/mcx0x0xpro.pdf, ComponentLink1URL=http://www.vishay.com/docs/28705/mcx0x0xpro.pdf, Composition="Thin Film", Failure Rate=-, Features=Anti-Sulfur, Height - Seated (Max)="0.015\" (0.37mm)", Packaging="Cut Tape (CT)", Part Status=Active, Pricing 1="1=0.3, 10=0.254, 100=0.0993, 1000=0.04158, 2500=0.03812, 5000=0.03465 (USD)", RoHS="RoHS Compliant", Size / Dimension="0.039\" L x 0.020\" W (1.00mm x 0.50mm)", Stock 1=3521, Supplier 1=Digi-Key
R29: library part CMP-1013-00215-1, "RES SMD 15K OHM 1% 1/10W 0805", Manufacturer="Vishay Beyschlag", Manufacturer Part Number=MCS04020C1502FE000, Operating Temperature="-55°C ~ 155°C", Package / Case="0402 (1005 Metric)", Power (Watts)="0.1W, 1/10W", Supplier Device Package=0402, Supplier Part Number 1=749-1555-1-ND, Temperature Coefficient=±50ppm/°C, Tolerance=±1%, Category=Resistors, ComponentLink1Description=http://www.vishay.com/docs/28705/mcx0x0xpro.pdf, ComponentLink1URL=http://www.vishay.com/docs/28705/mcx0x0xpro.pdf, Composition="Thin Film", Failure Rate=-, Features=Anti-Sulfur, Height - Seated (Max)="0.015\" (0.37mm)", Packaging="Cut Tape (CT)", Part Status=Active, Pricing 1="1=0.3, 10=0.254, 100=0.0993, 1000=0.04158, 2500=0.03812, 5000=0.03465 (USD)", RoHS="RoHS Compliant", Size / Dimension="0.039\" L x 0.020\" W (1.00mm x 0.50mm)", Stock 1=91476, Supplier 1=Digi-Key
U1: library part Beaglebone_Black, "Beaglebone Black Header", Current Rating="5.7A per Contact", Insulation Color=Black, Manufacturer="Samtec Inc.", Manufacturer Part Number=SSW-123-03-G-D, Material Flammability Rating="UL94 V-0", Operating Temperature="-55°C ~ 125°C", Supplier Part Number 1=SSW-123-03-G-D-ND, Voltage Rating=-, Applications=-, Category="Connectors, Interconnects", Connector Type=Receptacle, Contact Finish - Mating=Gold, Contact Finish - Post=Gold, Contact Finish Thickness - Mating="20.0µin (0.51µm)", Contact Finish Thickness - Post="3.00µin (0.076µm)", Contact Length - Post="0.394\" (10.00mm)", Contact Material="Phosphor Bronze", Contact Shape=Square, Contact Type=Forked, Fastening Type=Push-Pull, Features=-, Ingress Protection=-, Insulation Height="0.335\" (8.51mm)", Insulation Material="Liquid Crystal Polymer (LCP)", Mated Stacking Heights=-, Mounting Type="Through Hole", Number of Positions=46, Number of Positions Loaded=All, Packaging=Bulk, Part Status=Active, Pitch - Mating="0.100\" (2.54mm)", Pricing 1="1=6.51 (USD)", RoHS="RoHS Compliant", Row Spacing - Mating="0.100\" (2.54mm)", Stock 1=0, Style="Board to Board or Cable", Supplier 1=Digi-Key, Termination=Solder
U2 U9: library part CMP-0793-00136-1, "4.5 Ohm Ron, 8-Channel +/-5 V,+12 V, +5 V and +3.3 V Multiplexer, 16-pin SOP (RU-16), Tube", Base Part Number=ADG1608, Channel Capacitance (CS(off), CD(off))="19pF, 117pF", Current - Leakage (IS(off)) (Max)=100pA, Manufacturer="Analog Devices Inc.", On-State Resistance (Max)="4.5 Ohm", Operating Temperature="-40°C ~ 125°C (TA)", Package / Case="16-TSSOP (0.173\", 4.40mm Width)", Supplier Device Package=16-TSSOP, Supplier Part Number 1=ADG1608BRUZ-ND, Voltage - Supply, Dual (V±)="±3.3 V ~ 8 V", Voltage - Supply, Single (V+)="3.3 V ~ 16 V", -3db Bandwidth=40MHz, Category="Integrated Circuits (ICs)", Channel-to-Channel Matching (&Delta;Ron)="120 mOhm", Charge Injection=29pC, ComponentLink1Description=http://www.analog.com/media/en/technical-documentation/data-sheets/ADG1608_1609.pdf, ComponentLink1URL=http://www.analog.com/media/en/technical-documentation/data-sheets/ADG1608_1609.pdf, Crosstalk="-64dB @ 1MHz", Manufacturer Part Number=ADG1608BRUZ, Multiplexer/Demultiplexer Circuit=8:1, Packaging=Tube, Part Status=Active, Pricing 1="1=9.31, 96=8.01552, 192=6.95979, 576=6.0605 (USD)", RoHS="RoHS Compliant", Stock 1=1151, Supplier 1=Digi-Key, Switch Circuit=-, Switch Time (Ton, Toff) (Max)="94ns, 93ns"
U3 U5 U6 U7 U8 U11: library part CMP-0809-00005-2, "Precision, Low Noise, Rail-to-Rail Output, Zero-Drift Operational Amplifier, 4 to 36 V, -40 to 125 degC, 5-pin SOT23 (DBV5), Green (RoHS & no Sb/Br)", Current - Supply=450µA, Manufacturer="Texas Instruments", Operating Temperature="-40°C ~ 125°C", Package / Case="SC-74A, SOT-753", Supplier Device Package=SOT-23-5, Supplier Part Number 1=296-40438-1-ND, Voltage - Supply, Single/Dual (±)="4 V ~ 36 V, ±2 V ~ 18 V", Amplifier Type=Zero-Drift, Category="Integrated Circuits (ICs)", ComponentLink1Description=http://www.ti.com/lit/ds/symlink/opa188.pdf, ComponentLink1URL=http://www.ti.com/lit/ds/symlink/opa188.pdf, Manufacturer Part Number=OPA188AIDBVR, Mounting Type="Surface Mount", Output Type=Rail-to-Rail, Packaging="Cut Tape (CT)", Part Status=Active, Pricing 1="1=2.46, 10=2.211, 100=1.7771, 500=1.46002, 1000=1.20974 (USD)", RoHS="RoHS Compliant", Slew Rate="0.8 V/µs", Stock 1=1779, Supplier 1=Digi-Key
U10: library part CMP-0249-00017-1, "IC ADC 16BIT SRL 200KSPS 10UMAX", Base Part Number=MAX11100, Manufacturer="Maxim Integrated", Manufacturer Part Number=MAX11100EUB+, Operating Temperature="-40°C ~ 85°C", Package / Case="10-TFSOP, 10-MSOP (0.118\", 3.00mm Width)", Supplier Device Package=10-uMAX, Supplier Part Number 1=MAX11100EUB+-ND, Voltage - Supply, Analog=5V, Voltage - Supply, Digital="2.7 V ~ 5.25 V", Architecture=SAR, Category="Integrated Circuits (ICs)", ComponentLink1Description=https://datasheets.maximintegrated.com/en/ds/MAX11100.pdf, ComponentLink1URL=https://datasheets.maximintegrated.com/en/ds/MAX11100.pdf, Configuration=S/H-ADC, Data Interface=SPI, Features=-, Input Type="Single Ended", Number of Bits=16, Number of Inputs=1, Packaging=Tube, Part Status=Active, Pricing 1="1=5.98, 10=5.855 (USD)", Ratio - S/H:ADC=1:1, Reference Type=External, RoHS="RoHS Compliant", Sampling Rate (Per Second)=200k, Stock 1=927, Supplier 1=Digi-Key
U12: "IC VREF SERIES 4.096V SOT23", Current - Supply=350µA, Manufacturer="Maxim Integrated", Operating Temperature="-40°C ~ 125°C (TA)", Package / Case=SOT-23-6, Supplier Part Number 1=MAX6070AAUT41+TCT-ND, Temperature Coefficient=6ppm/°C, Tolerance=±0.04%, Voltage - Input="4.3 V ~ 5.5 V", Voltage - Output (Min/Fixed)=4.096V, Category="Integrated Circuits (ICs)", ComponentLink1Description=https://datasheets.maximintegrated.com/en/ds/MAX6070-MAX6071.pdf, ComponentLink1URL=https://datasheets.maximintegrated.com/en/ds/MAX6070-MAX6071.pdf, Manufacturer Part Number=MAX6070AAUT41+T, Mounting Type="Surface Mount", Noise - 0.1Hz to 10Hz=9.6µVp-p, Noise - 10Hz to 10kHz=9µVrms, Output Type=Fixed, Packaging="Cut Tape (CT)", Part Status=Active, Pricing 1="1=3.41, 10=3.213, 25=2.5704, 50=2.4418, 100=2.2491, 250=2.13344, 500=2.05634 (USD)", Reference Type=Series, RoHS="RoHS Compliant", Stock 1=2623, Supplier 1=Digi-Key, Supplier Device Package=SOT-23-6
U13: library part CMP-0809-00010-2, "0.03 uV/C, Low Noise, Rail-to-Rail Output, Zero-Drift Operational Amplifier, 4 to 36 V, -40 to 125 degC, 14-pin SOP (PW14), Green (RoHS & no Sb/Br)", Manufacturer="Texas Instruments", Rating=Catalog, Total Supply Voltage(Max)(+5V is 5, +/-5V is 10)=36, Total Supply Voltage(Min)(+5V is 5, +/-5V is 10)=4, CMRR(Min)(dB)=120, Code_JEDEC=MO-153, ComponentLink1Description="Manufacturer URL", ComponentLink1URL=http://www.ti.com/, ComponentLink2Description=Datasheet, ComponentLink2URL=http://www.ti.com/lit/ds/symlink/opa4188.pdf, ComponentLink3Description="Package Specification", ComponentLink3URL=http://www.ti.com/litv/pdf/mpds360, DatasheetVersion=SBOS641B, Eco-Plan="Green (RoHS & no Sb/Br)", GBW(Typ)(MHz)=2, Iq per channel(Max)(mA)=0.475, Mounting Technology="Surface Mount", Number of Channels=4, Offset Drift(Typ)(uV/C)=0.03, PackageDescription="14-Pin Plastic Small Outline, Body 5 x 4.4 mm, Pitch 0.65 mm", PackageReference=PW0014A, PackageVersion="4040064-3/G, 02/2011", PartId=1, PartNumber=OPA4188AIPW, Slew Rate(Typ)(V/us)=0.8, SubFamily="High Supply Voltage Amplifier (>=30V), Low Noise Amp (<=10nV/rtHz), Low Offset Voltage Amplifier (<=500uV), Low Power Amp (<=500uA), Zero Drift Precision Amplifier"

## Free pads (board coordinates)
  round 196.85 hole 118.11 unplated: ""(4195,-3395) ""(4923.19,2157.08) ""(7049.17,2157.08)

## Nets (pads, with @x,y where several pads share a name; then routed paths per layer and width w, separated by ;. In a path a pad name is that pad's centre, name@x,y a point inside that pad or via, vN(x,y) a via of type N, cw(c..) or ccw(c..) an arc to the next point about the centre after c; other vN are vias at no path point)
+3.3: C8.1 P1.5 P2.26 P3.3 P3.4 P4.20 U1.9-15 U2.2 U2.13 U9.4 U10.3 U13.4
"+3.3 BBB": U1.9-3 U1.9-4
+5: C1.2 C3.2 C4.2 C5.2 C6.2 C7.1 DS1.1 P1.1 P2.21 P4.19 R22.1 U3.5 U5.5 U6.5 U7.5 U8.5 U9.2 U9.13 U10.7 U11.5 U12.3 U12.4
"+5 BBB": P2.2 R14.1 U1.9-5 U1.9-6
+12: P1.13 P2.29 P2.30 P3.1 P3.2 P4.21 P4.22 R15.1 R27.1
-5: P1.17 P2.25 P4.3 R29.2 U9.3 U11.2
"ADC REF": C10.2 U10.6 U12.5 U12.6
AIN: U9.8 U10.5
"Arrestment Heater FET": U1.8-3
"Arrestment Heater FET_Buff": P4.16
Batt_1_Stat: P1.8
Batt_2_Stat: P1.10
Battery_1: P1.11 R20.1
Battery_2: P1.15 R21.1
BBB_PWR_SW: P2.4 U1.9-9
"Board Heater FET 1": R6.1 U1.8-7 U5.3
"Board Heater FET 2": R10.1 U1.8-8 U7.3
"Board Heater FET_Buff 1": DS4.1 P4.17 U5.1 U5.4
"Board Heater FET_Buff 2": DS6.1 P4.18 U7.1 U7.4
CH1: R15.2 R18.1 U9.5
CH2: R20.2 R23.1 U9.6
CH3: R21.2 R24.1 U9.7
CH4: R26.2 U9.12 U11.1
CH5: R14.2 R17.1 U9.11
CH6: R22.2 R25.1 U9.10
CH7: R16.2 R19.1 U9.9
"Conning Tower FET": U1.8-4 U8.3
"Conning Tower Heater FET Buff": P4.14 U8.1 U8.4
FB_CS0: P2.5 U2.6
FB_MUX_A0: P1.28 U1.8-25
FB_MUX_A1: P1.26 U1.8-26
"Gearbox Heater FET": R8.1 U1.8-6 U6.3
"Gearbox Heater FET_Buff": DS5.1 P4.15 U6.1 U6.4
GND: C1.1 C3.1 C4.1 C5.1 C6.1 C7.2 C8.2 C9.2 C10.1 P1.3 P1.24 P1.27 P2.1 P2.19 P2.20 P2.22 P2.23 P2.24 P2.27 P2.28 P4.1 P4.2 P4.23 P4.24 R1.2 R2.2 R3.2 R6.2 R7.2 R8.2 R9.2 R10.2 R11.2 R17.2 R18.2 R19.2 R23.2 R24.2 R25.2 U1.8-1 U1.8-2 U1.9-1 U1.9-2 U1.9-43 U1.9-44 U1.9-45 U1.9-46 U2.3 U2.14 U3.2 U5.2 U6.2 U7.2 U8.2 U9.14 U10.2 U10.4 U10.8 U11.3 U12.2 U13.11
Heartbeat: U1.8-29 U1.9-42
"Meter Heater FET": R2.1 U1.8-5 U3.3
"Meter Heater FET_Buff": DS2.1 P4.13 U3.1 U3.4
"MUX A2": P4.7 U13.1 U13.2
"MUX A3": P4.11 U13.13 U13.14
"MUX D2": U1.8-16
MUX_A0: P4.8 U13.8 U13.9
MUX_A1: P4.6 U13.6 U13.7
MUX_D0: U1.8-14
MUX_D1: U1.8-15
NetC9_1: C9.1 U12.1
NetDS1_2: DS1.2 R1.1
NetDS2_2: DS2.2 R3.1
NetDS3_2: 
NetDS4_2: DS4.2 R7.1
NetDS5_2: DS5.2 R9.1
NetDS6_2: DS6.2 R11.1
NetDS7_2: 
NetR26_1: R26.1 R28.2 U11.4
NetR27_2: R27.2 R28.1 R29.1
NetU1_8-9: U1.8-9
NetU1_8-10: U1.8-10
NetU1_8-11: U1.8-11
NetU1_8-12: U1.8-12
NetU1_8-17: U1.8-17
NetU1_8-18: U1.8-18
NetU1_8-27: U1.8-27
NetU1_8-30: U1.8-30
NetU1_8-35: U1.8-35
NetU1_8-36: U1.8-36
NetU1_8-37: U1.8-37
NetU1_8-38: U1.8-38
"Power A0": U1.8-42 U9.1
"Power A1": U1.8-43 U9.16
"Power A2": U1.8-44 U9.15
Power_CS0: P2.9 U2.4
PWM1A: P2.8 U1.9-14
PWM2A: P1.18 U1.8-19
PWM2B: P1.22 U1.8-13
Serial1_RX: U1.9-26
Serial1_TX: U1.9-24
Serial4_RX: U1.9-11
Serial4_TX: U1.9-13
SINE_CS0: P1.21 U2.7
SPI0_CS0: U1.9-17 U2.8
"SPI0_CS0_MUX A2": U1.8-41 U2.15
SPI0_CS0_MUX_A0: U1.8-39 U2.1
SPI0_CS0_MUX_A1: U1.8-40 U2.16
SPI0_MISO: P2.12 P4.9 U1.9-21 U10.1
SPI0_MOSI: P2.10 U1.9-18
SPI0_SCLK: P2.14 P4.10 U1.9-22 U10.10
SPI0_SYS_VOLTAGE_CS0: U2.5 U10.9
SPI1_CS0: U1.9-28
SPI1_MISO: U1.9-29
SPI1_MOSI: U1.9-30
SPI1_SCLK: U1.9-31
Sys_Pwr_Enable: P1.14 U1.8-22
T_MUX_A0: U1.8-31 U13.10
T_MUX_A1: U1.8-32 U13.5
T_MUX_A2: U1.8-33 U13.3
T_MUX_A3: U1.8-34 U13.12
Thermistor_CS0: P4.12 U2.9
ZH: P2.17 R16.1
pads on no net: P1.2 P1.4 P1.6 P1.7 P1.9 P1.12 P1.16 P1.19 P1.20 P1.23 P1.25 P1.29 P1.30 P2.3 P2.6 P2.7 P2.11 P2.13 P2.15 P2.16 P2.18 P4.4 P4.5 U1. U1.8-20 U1.8-21 U1.8-23 U1.8-24 U1.8-28 U1.8-45 U1.8-46 U1.9-7 U1.9-8 U1.9-10 U1.9-12 U1.9-16 U1.9-19 U1.9-20 U1.9-23 U1.9-25 U1.9-27 U1.9-32 U1.9-33 U1.9-34 U1.9-35 U1.9-36 U1.9-37 U1.9-38 U1.9-39 U1.9-40 U1.9-41 U2.10 U2.11 U2.12
copper on no net: | length 380.7
  Top Layer w10: 5858.92,648.46 5887.51,619.88 5958.98,619.88 6001.89,619.88 6151.89,469.88 6165.67,469.88

## Polygon pours and split planes (outlines as drawn)
GND on Top Layer "GND" (solid, shelved, pour order 95): -1169.1,-7274.29 1468.9,-7274.29 1468.9,364.88 -1169.1,364.88
GND on Bottom Layer "GND" (solid, shelved, pour order 79): -1169.1,-7274.29 1468.9,-7274.29 1468.9,363.55 -1169.1,363.56
+5 on +5V (split plane): 425 vertices, not listed, extent -3479.99,-3479.99 3479.99,3479.99
+3.3 on +3.3V (split plane): 425 vertices, not listed, extent -3479.99,-3479.99 3479.99,3479.99

## Silkscreen, mask and mechanical layers (free items; w line width, h text height)
Top Overlay:
  circle w10: c5835,3140 r3500
  circle w3.94: c4926.38,2509.88 r183.58
  circle w10: c4926.38,2509.88 r196.85
  lines w3.94: 4866.38,2602.88 4896.38,2572.88 4926.38,2592.88 4886.38,2542.88 4946.38,2572.88 4906.38,2522.88 4966.38,2552.88 4926.38,2502.88 4986.38,2532.88 4946.38,2482.88 5006.38,2512.88 4986.38,2482.88 5016.38,2452.88
  lines w10: 4846.38,2607.88 4886.38,2607.88 ; 4866.38,2602.88 4866.38,2452.88 5016.38,2452.88 ; 5021.38,2432.88 5021.38,2472.88 ; 5835,3240 5835,3276.81 5992.32,3276.81 6131.32,3276.81 ; 6135,3240 6135,3276.81
  lines w30: -1168.21,-3502.6 1460.8,-3502.6
  text "TOP" at 4840.4,3279.13 h39.37
  text "Computer  / Power On" at 6816.38,3248.43 h25.59
  text "LM-003" at 4726.38,2906.38 h50
  text "REV" at 4726.38,2834.88 h50
  text "ZLS Corp" at 4726.38,2759.88 h50
  text "ZLS" at 4909.17,2388.43 h29.53
  text "Power Imput" at 5545.2,1901.18 h78.74
  text "Embedded Processor" at -257.48,986.95 h78.74
Bottom Overlay:
  lines w10: 1310.02,-3494.71 1461.8,-3494.71
  lines w30: -1168.62,-3502.6 1431.38,-3502.6
  text "P9" at 1495,2623.83 h25.59
  text "2" at 1276.38,2546.38 h25.59
  text "1" at 1579.3,2544.72 h25.59
  text "GBH" at -858.62,2306.38 h25.59 r270
  text "MH" at -858.62,2046.38 h25.59 r270
  text "BH1" at -858.62,1766.38 h25.59 r270
  text "Feedback" at 6281.46,1684.64 h78.74
  text "20" at 1291.38,1644.88 h25.59
  text "19" at 1581.38,1644.88 h25.59
  text "19" at -338.62,1634.88 h25.59
  text "BH2" at -858.62,1466.38 h25.59 r270
  text "Motor Control / Bluetooth" at 942.32,1304.56 h78.74
  text "40" at 1291.38,647.38 h25.59
Mechanical 13:
  text "Stand-off for bottom: / HEX STANDOFF #4-40 SS 7/16\" / P/N: 4504-440-SS" at -1211.81,1044.88 h25.59
  text "Stand-off for top:  / HEX STANDOFF #4-40 SS 3/8\" / P/N: 2055-440-SS-20" at 978.19,1024.88 h25.59

## Dimensions
7049.17,2157.08 to 4923.19,2157.08 on Mechanical 13
1468.9,363.71 to 0,3500 on Mechanical 13

## Text inside footprints (layer, text, board x,y; h text height)
U1: Top Overlay "P9" at 988.62,-195.59 h25.59; Top Overlay "P8" at -635,-340 h25.59 r90